# Altium PCB DLP.PcbDoc
Units mil, origin at the board's own origin, x right, y up, seen from the top; angles counter-clockwise.
Board outline 6000 x 4000 mil, 2 copper layers (Top Layer, Bottom Layer); 77 components, 240 nets, 526 pads, 12 vias.
Unrouted connection lines stored in the file: 220.
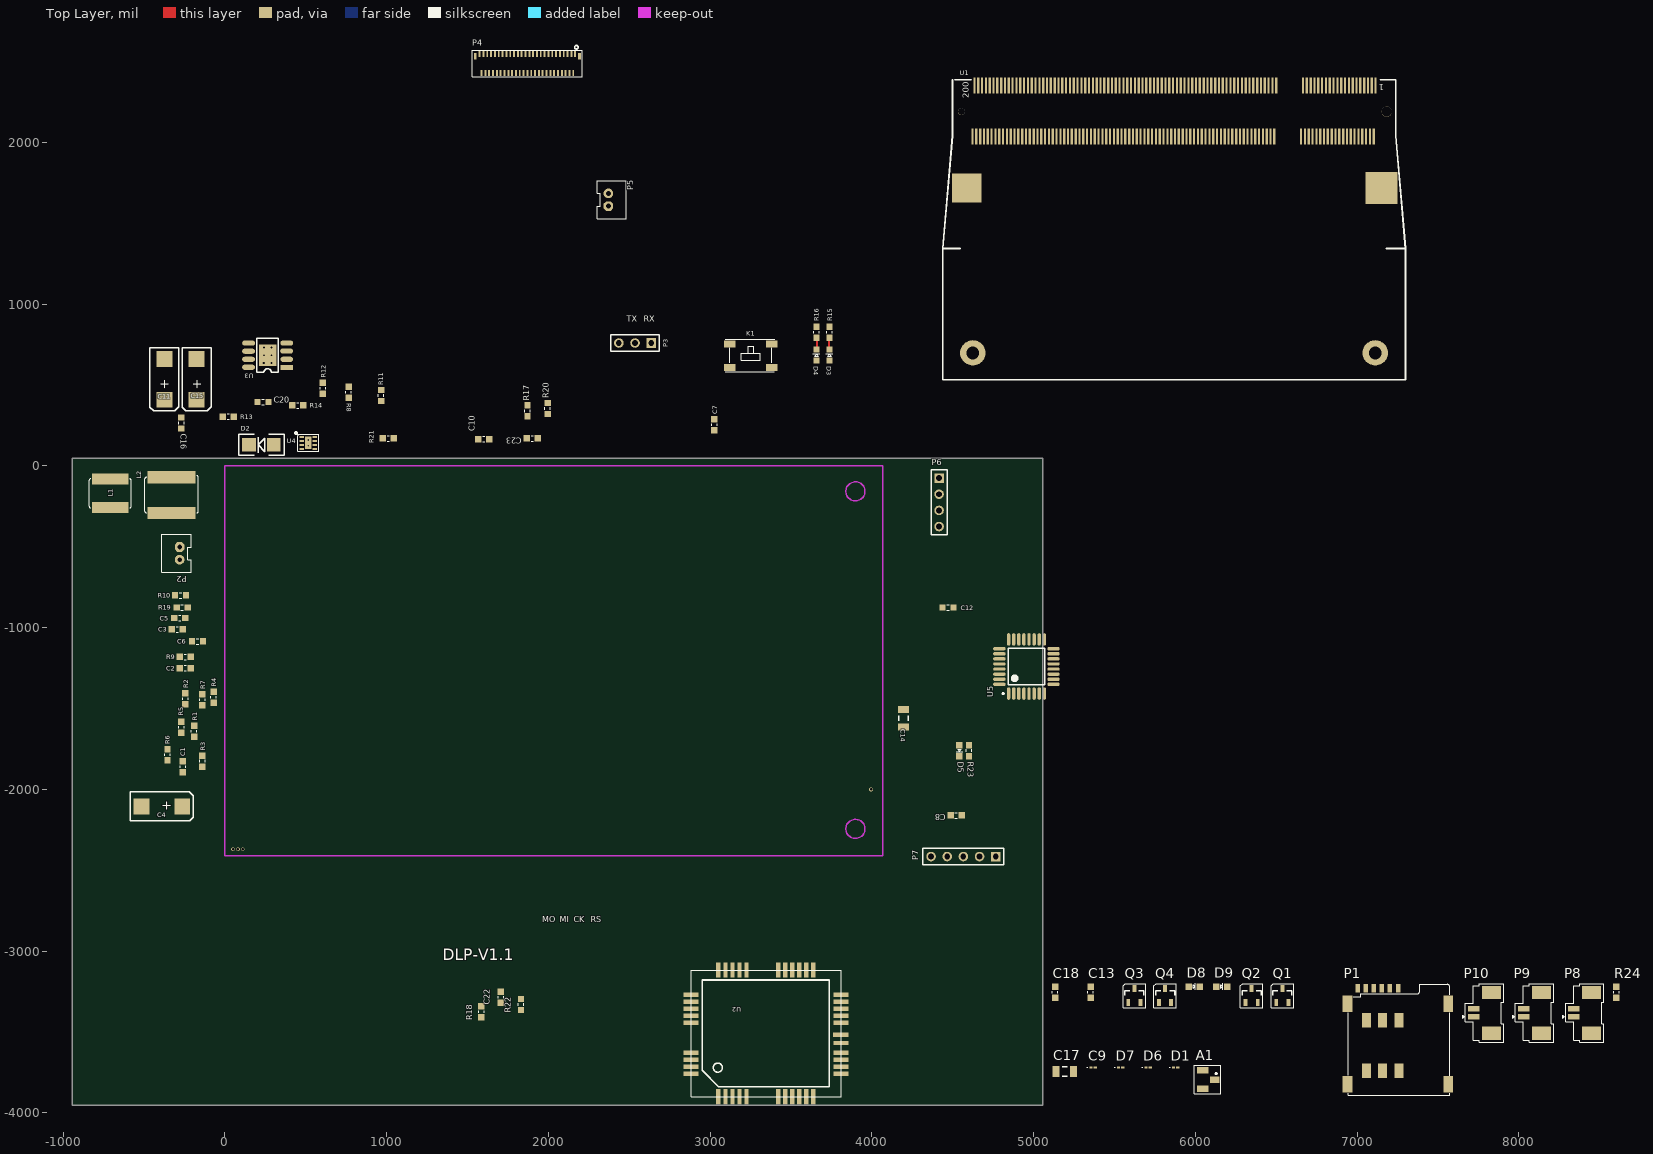
[diagram p0: Top Layer view]
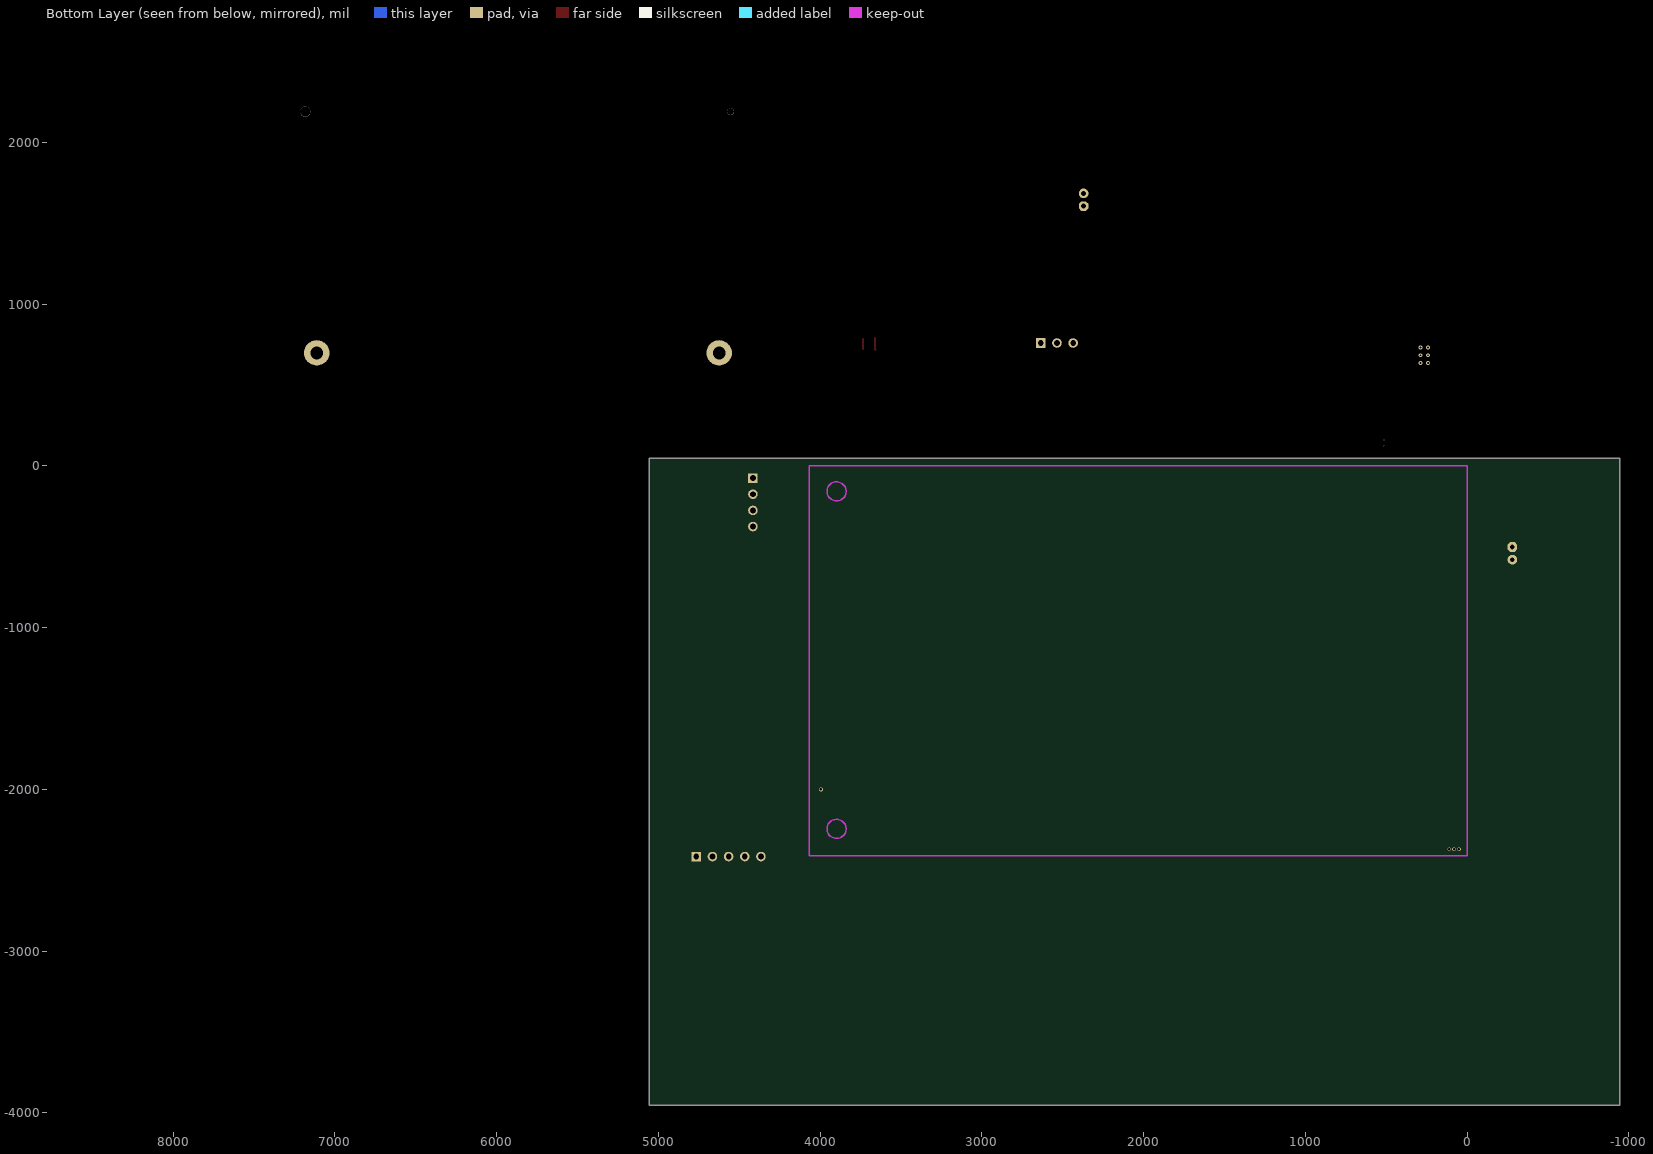
[diagram p1: Bottom Layer view, seen from below]

## Layer stack, top to bottom
Top Solder: solder mask 0.4, Solder Resist, Dk 3.5
Top Layer: signal copper 1.4
Dielectric1: dielectric 12.6, FR-4, Dk 4.8
Bottom Layer: signal copper 1.4
Bottom Solder: solder mask 0.4, Solder Resist, Dk 3.5

## Board outline
-943,-3954 5057,-3954 5057,46 -943,46

## Design rules (kind name [scope] priority, off if disabled: settings)
Clearance [All] p1: gap=6
ComponentClearance [All] p1 off: gap=10 collisioncheckmode=3 verticalgap=10 showdistances=FALSE
FabricationTestPointUsage TestPointUsage [All] p1: valid=0 allowmultiple=FALSE
FabricationTestpoint Testpoint [All] p1: side=3 testpointundercomponent=TRUE minsize=40 maxsize=100 preferedsize=60 minholesize=0 maxholesize=40 preferedholesize=32 testpointgrid=1 allowsidetop=TRUE allowsidebottom=TRUE usegrid=TRUE gridtolerance=0.01
HoleSize [All] p1: absolutevalues=TRUE maxlimit=150 minlimit=1 maxpercent=80.000 minpercent=20.000
PolygonConnect [All] p1: connectstyle=Relief reliefconductorwidth=10 reliefentries=4 polygonreliefangle="90 Angle" airgapwidth=10
RoutingVias [All] p1: holewidth=14 width=28 viastyle="Through Hole" minholewidth=8 minwidth=15 maxholewidth=130 maxwidth=150
SolderMaskExpansion [All] p1: expansion=4
Width [All] p1: maxlimit=100 minlimit=8 preferedwidth=10 minimp=50.000000 maximp=50.000000 favimp=50.000000
26 further rules are at their usual default settings.

## Components (designator, comment, footprint, x,y, rotation, side; value= is the part's Value field where it differs from the comment)
A1 "IPEX" IPEX 6072,-3794 r0 top
C1 "Cap" 0603#1 -260,-1860 r90 top
C2 "Cap" 0603#1 -245,-1250 r180 top
C3 "Cap" 0603#1 -295,-1010 r180 top
C4 "Cap Pol3" C7343 -390,-2105 r180 top
C5 "Cap" 0603#1 -280,-940 r0 top
C6 "Cap" 0603#1 -170,-1085 r0 top
C7 "100PF" 0603#1 3025,255 r270 top
C8 "104" 0603#1 4520,-2160 r180 top
C9 "Cap" 0603#2 5367,-3719 r0 top
C10 "10uF" 0603#1 1600,165 r0 top
C11 "470uF/16V" C7343 -375,535 r90 top
C12 "100nF" 0603#1 4470,-875 r180 top
C13 "0.1uF" 0603#1 5352,-3254 r90 top
C14 "47uF" C1206 4195,-1560 r90 top
C15 "100uF/35V" C7343 -175,535 r90 top
C16 "100nF" 0603#1 -270,265 r270 top
C17 "47uF" C1206 5192,-3744 r0 top
C18 "0.1uF" 0603#1 5132,-3254 r90 top
C20 "10nF" 0603#1 235,395 r0 top
C22 "Cap" 0603#1 1705,-3285 r270 top
C23 "Cap" 0603#1 1900,170 r180 top
D1 "RL0603E012M100K" 0603#2 5877,-3719 r0 top
D2 "SS54" SMA 225,130 r180 top
D3 "BLUE" 0603-LED 3737,686 r90 top
D4 "BLUE" 0603-LED 3657,686 r90 top
D5 "BLUE" 0603-LED 4540,-1760 r270 top
D6 "RL0603E012M100K" 0603#2 5707,-3719 r0 top
D7 "RL0603E012M100K" 0603#2 5537,-3719 r0 top
D8 "WORK" 0603-LED 5992,-3219 r0 top
D9 "LINK" 0603-LED 6162,-3219 r0 top
K1 "AJ" 4*4*1.5 3120,755 r0 top
L1 "2.2uH" L-6045 -710,-80 r270 top
L2 "10uH/4A" L-8040 -330,-70 r270 top
P1 "MircoSIM" "Micro SIM" 7057,-3739 r0 top
P2 "CON2" PH2.0-2P -280,-580 r270 top
P3 "" HDR1X3 2635,760 r180 top
P4 "FPC-51PIN" FH26-51S-0.3SHW 2165,2545 r0 top
P5 "Header 2" PH2.0-2P 2370,1685 r90 top
P6 "CSB" HDR1X4 4415,-75 r270 top
P7 "Header 5" HDR1X5 4765,-2415 r180 top
P8 "UP" 1.25-2P 8337,-3224 r0 top
P9 "DOWN" 1.25-2P 8027,-3224 r0 top
P10 "MOTOR" 1.25-2P 7717,-3224 r0 top
Q1 "NPN" SOT-23-NPN 6537,-3274 r0 top
Q2 "NPN" SOT-23-NPN 6347,-3274 r0 top
Q3 "NPN" SOT-23-NPN 5622,-3274 r0 top
Q4 "NPN" SOT-23-NPN 5812,-3274 r0 top
R1 "Res1" 0603#1 -190,-1640 r90 top
R2 "Res1" 0603#1 -245,-1440 r90 top
R3 "Res1" 0603#1 -140,-1825 r90 top
R4 "Res1" 0603#1 -70,-1430 r90 top
R5 "Res1" 0603#1 -270,-1615 r90 top
R6 "Res1" 0603#1 -355,-1785 r90 top
R7 "Res1" 0603#1 -140,-1445 r90 top
R8 "Res1" 0603#1 765,455 r90 top
R9 "Res1" 0603#1 -245,-1180 r0 top
R10 "Res1" 0603#1 -275,-800 r180 top
R11 "Res1" 0603#1 965,435 r270 top
R12 "Res1" 0603#1 605,480 r270 top
R13 "4.3KF" 0603#1 20,305 r0 top
R14 "1.5KF" 0603#1 450,375 r0 top
R15 "1K" 0603#1 3737,826 r270 top
R16 "1K" 0603#1 3657,826 r270 top
R17 "Res1" 0603#1 1870,340 r90 top
R18 "Res1" 0603#1 1585,-3375 r270 top
R19 "4.3K" 0603#1 -265,-875 r0 top
R20 "Res1" 0603#1 1995,355 r90 top
R21 "680R" 0603#1 1010,170 r180 top
R22 "Res1" 0603#1 1830,-3330 r90 top
R23 "1K" 0603#1 4600,-1760 r270 top
R24 "Res1" 0603#1 8602,-3254 r90 top
U1 "MAX6-200" "SO-DIMM 200" 5870,1460 r180 top
U2 "G3524" G3524 3110,-3485 r90 top
U3 "LM22676" SO-8HP 270,660 r180 top
U4 "TLV62084" WSON8 515,170 r0 top
U5 "ATmega48PA" 32A_M 4955,-1240 r90 top

## Footprints (in the part's own frame and the unit in brackets; to place one, negate y for a bottom-side part, rotate by r counter-clockwise, add the part's x,y. Pads: shape width x height; smd on the part's side, far side on the other; paste and mask are expansions set on the pad)
1.25-2P [mil]
  rect 118x83 smd: 0(112.44,-283.46) 0(112.44,-31.5)
  rect 71x32 smd: 1(2.2,-181.1) 2(2.2,-131.89)
  silkscreen extent -66,-339 187,24
4*4*1.5 [mm]
  rect 1.8x1.1 smd: 1(0,0) 2(6.6,0) 3(0,-3.7) 4(6.6,-3.7)
  silkscreen extent -0.7,-4.4 7.1,0.7
32A_M [mm] "32-Pin Thin Quad Flat Pack 0.8 mm Pitch, IPC Low Density"
  oval 1.95x0.533 smd: 1(-4.25,2.8) 2(-4.25,2) 3(-4.25,1.2) 4(-4.25,0.4) 5(-4.25,-0.4) 6(-4.25,-1.2) 7(-4.25,-2) 8(-4.25,-2.8) 17(4.25,-2.8) 18(4.25,-2) 19(4.25,-1.2) 20(4.25,-0.4) 21(4.25,0.4) 22(4.25,1.2) 23(4.25,2) 24(4.25,2.8)
  oval 0.533x1.95 smd: 9(-2.8,-4.25) 10(-2,-4.25) 11(-1.2,-4.25) 12(-0.4,-4.25) 13(0.4,-4.25) 14(1.2,-4.25) 15(2,-4.25) 16(2.8,-4.25) 25(2.8,4.25) 26(2,4.25) 27(1.2,4.25) 28(0.4,4.25) 29(-0.4,4.25) 30(-1.2,4.25) 31(-2,4.25) 32(-2.8,4.25)
  silkscreen extent -4.37,-2.85 2.85,3.77, body extent -3.5,-3.5 3.5,3.5, height 1.2
0603#1 [mm]
  rect 1x1 smd: 1(-0.864,0) 2(0.864,0)
  silkscreen extent -0.18,-0.43 0.18,0.43
0603#2 [mm] "Chip Inductor, Body 0.6x0.3mm, IPC High Density"
  rect 0.5x0.3 smd: 1(-0.35,0) 2(0.35,0)
  silkscreen extent -0.9,-0.05 -0.9,0.05, body extent -0.33,-0.18 0.33,0.18, height 0.55
0603-LED [mm]
  rect 1x1 smd: 1(-0.864,0) 2(0.864,0)
  silkscreen extent -0.18,-0.51 0.18,0.56
C1206 [mm] "Chip Capacitor, Body 3.2x1.6mm, IPC High Density"
  rect 1.1x1.7 smd: 1(-1.35,0) 2(1.35,0)
  silkscreen extent -0.4,-0.75 0.4,0.75, body extent -1.7,-0.9 1.7,0.9, height 1.3
C7343 [mm] "Molded Capacitor, 2-Leads, Body 7.3x4.3mm, IPC Medium Density"
  rect 2.45x2.5 smd: 1(-3.2,0) 2(3.2,0)
  silkscreen extent -4.95,-2.29 4.95,2.29, body extent -3.75,-2.25 3.75,2.25, height 4.3
FH26-51S-0.3SHW [mm]
  rect 0.45x1 smd: 0(-15.7,-0.3) 0(0.7,-0.3)
  rect 0.3x0.95 smd: 1(0,0.05) 2(-0.3,-2.91) 3(-0.6,0.05) 4(-0.9,-2.91) 5(-1.2,0.05) 6(-1.5,-2.91) 7(-1.8,0.05) 8(-2.1,-2.91) 9(-2.4,0.05) 10(-2.7,-2.91) 11(-3,0.05) 12(-3.3,-2.91) 13(-3.6,0.05) 14(-3.9,-2.91) 15(-4.2,0.05) 16(-4.5,-2.91) 17(-4.8,0.05) 18(-5.1,-2.91) 19(-5.4,0.05) 20(-5.7,-2.91) 21(-6,0.05) 22(-6.3,-2.91) 23(-6.6,0.05) 24(-6.9,-2.91) 25(-7.2,0.05) 26(-7.5,-2.91) 27(-7.8,0.05) 28(-8.1,-2.91) 29(-8.4,0.05) 30(-8.7,-2.91) 31(-9,0.05) 32(-9.3,-2.91) 33(-9.6,0.05) 34(-9.9,-2.91) 35(-10.2,0.05) 36(-10.5,-2.91) 37(-10.8,0.05) 38(-11.1,-2.91) 39(-11.4,0.05) 40(-11.7,-2.91) 41(-12,0.05) 42(-12.3,-2.91) 43(-12.6,0.05) 44(-12.9,-2.91) 45(-13.2,0.05) 46(-13.5,-2.91) 47(-13.8,0.05) 48(-14.1,-2.91) 49(-14.4,0.05) 50(-14.7,-2.91) 51(-15,0.05)
  silkscreen extent -16.2,-3.5 1.1,1.38
G3524 [mm]
  rect 2.4x0.7 smd: 1(-10.55,1.5) 2(-10.55,0.4) 3(-10.55,-0.7) 4(-10.55,-1.8) 5(-10.55,-2.9) 6(-10.55,-7.9) 7(-10.55,-9) 8(-10.55,-10.1) 9(-10.55,-11.2) 10(-10.55,-12.3) 11(-10.55,-13.4) 21(9.35,-13.4) 22(9.35,-12.3) 23(9.35,-11.2) 24(9.35,-10.1) 25(9.35,-9) 26(9.35,-7.9) 27(9.35,-2.9) 28(9.35,-1.8) 29(9.35,-0.7) 30(9.35,0.4) 31(9.35,1.5)
  rect 0.7x2.4 smd: 12(-6.95,-17.75) 13(-5.85,-17.75) 14(-4.75,-17.75) 15(-3.65,-17.75) 16(1.05,-17.75) 17(2.15,-17.75) 18(3.25,-17.75) 19(4.35,-17.75) 20(5.45,-17.75) 32(5.45,5.8) 33(4.35,5.8) 34(3.25,5.8) 35(2.15,5.8) 36(1.05,5.8) 37(-3.65,5.8) 38(-4.75,5.8) 39(-5.85,5.8) 40(-6.95,5.8) 41(-2.1,-17.75) 42(-0.8,-17.7)
  silkscreen extent -10.55,-17.8 9.35,5.8
HDR1X3 [mm] "Connector; Header; 3 Position"
  rect 1.5x1.5 hole 0.9: 1(0,0)
  round 1.5 hole 0.9: 2(2.54,0) 3(5.08,0)
  silkscreen extent -1.27,-1.27 6.35,1.27
HDR1X4 [mm] "Connector; Header; 4 Position"
  rect 1.5x1.5 hole 0.9: 1(0,0)
  round 1.5 hole 0.9: 2(2.54,0) 3(5.08,0) 4(7.62,0)
  silkscreen extent -1.27,-1.27 8.89,1.27
HDR1X5 [mm] "Connector; Header; 5 Position"
  rect 1.5x1.5 hole 0.9: 1(0,0)
  round 1.5 hole 0.9: 2(2.54,0) 3(5.08,0) 4(7.62,0) 5(10.16,0)
  silkscreen extent -1.27,-1.27 11.43,1.27
IPEX [mil] "SOT23, 3-Leads, Body 3.0x2.6mm (max), Pitch 0.95mm, IPC Medium Density"
  rect 59.06x41.34 smd: 1(46.5,-0.5)
  rect 70.87x39.37 smd: 2(-28.5,57.5) 3(-28.5,-57.5)
  silkscreen extent -80,-88 86,88
L-6045 [mm]
  rect 1.7x5.7 smd: 1(0,0) 2(4.5,0)
  silkscreen extent 0,-3.3 4.57,3.3
L-8040 [mm]
  rect 1.9x7.5 smd: 1(0,0) 2(5.6,0)
  silkscreen extent -0.25,-4.19 5.6,4.19
"Micro SIM" [mm]
  rect 1.55x2.6 smd: 0(-2.95,-2.15) 0(-2.95,10.53) 0(12.85,-2.15) 0(12.85,10.53)
  rect 1.4x2.3 smd: 0(0,0) 0(0,7.92) 0(2.54,0) 0(2.54,7.92) 0(5.08,0) 0(5.08,7.92)
  rect 0.7x1.35 smd: 1(-0.12,12.955) 2(2.42,12.955) 3(4.96,12.955) 5(-1.39,12.955) 6(1.15,12.955) 7(3.69,12.955)
  silkscreen extent -2.82,-3.82 13.05,13.58
PH2.0-2P [mil]
  oct 60x60 hole 30: 1(-78.74,0)
  round 60 hole 30: 2(0,0)
  silkscreen extent -157,-110 79,70
SMA [mm] "Molded Diode, 2-Leads, Body 4.3x2.7mm, IPC Medium Density"
  rect 2.15x2.15 smd: 1(-1.93,0) 2(1.93,0)
  silkscreen extent -3.56,-1.65 3.56,1.65, body extent -2.28,-1.42 2.29,1.42, height 2.95
SO-8HP [mm]
  rect 2x0.8 smd: 1(-2.847,1.29)
  oval 2x0.8 smd: 2(-2.847,0.02) 3(-2.813,-1.275) 4(-2.847,-2.52) 5(3.153,-2.52) 6(3.153,-1.25) 7(3.153,0.02) 8(3.153,1.265)
  rect 2.8x3.4 smd: 9(0.128,-0.615)
  silkscreen extent -1.55,-3.31 1.85,2.09
"SO-DIMM 200" [mm]
  round 1.6 hole 1.6: 0(-33.337,-18.553)
  rect 5x5 smd: 0(-32.487,-6.553)
  rect 4.572x4.572 smd: 0(32.613,-6.553)
  round 1.1 hole 1.1: 0(33.463,-18.553)
  rect 0.35x2.55 smd: 1(-31.587,-22.653) 2(-31.287,-14.653) 3(-30.987,-22.653) 4(-30.687,-14.653) 5(-30.387,-22.653) 6(-30.087,-14.653) 7(-29.787,-22.653) 8(-29.487,-14.653) 9(-29.187,-22.653) 10(-28.887,-14.653) 11(-28.587,-22.653) 12(-28.287,-14.653) 13(-27.987,-22.653) 14(-27.687,-14.653) 15(-27.387,-22.653) 16(-27.087,-14.653) 17(-26.787,-22.653) 18(-26.487,-14.653) 19(-26.187,-22.653) 20(-25.887,-14.653) 21(-25.587,-22.653) 22(-25.287,-14.653) 23(-24.987,-22.653) 24(-24.687,-14.653) 25(-24.387,-22.653) 26(-24.087,-14.653) 27(-23.787,-22.653) 28(-23.487,-14.653) 29(-23.187,-22.653) 30(-22.887,-14.653) 31(-22.587,-22.653) 32(-22.287,-14.653) 33(-21.987,-22.653) 34(-21.687,-14.653) 35(-21.387,-22.653) 36(-21.087,-14.653) 37(-20.787,-22.653) 38(-20.487,-14.653) 39(-20.187,-22.653) 40(-19.887,-14.653) 41(-15.987,-22.653) 42(-15.687,-14.653) 43(-15.387,-22.653) 44(-15.087,-14.653) 45(-14.787,-22.653) 46(-14.487,-14.653) 47(-14.187,-22.653) 48(-13.887,-14.653) 49(-13.587,-22.653) 50(-13.287,-14.653) 51(-12.987,-22.653) 52(-12.687,-14.653) 53(-12.387,-22.653) 54(-12.087,-14.653) 55(-11.787,-22.653) 56(-11.487,-14.653) 57(-11.187,-22.653) 58(-10.887,-14.653) 59(-10.587,-22.653) 60(-10.287,-14.653) 61(-9.987,-22.653) 62(-9.687,-14.653) 63(-9.387,-22.653) 64(-9.087,-14.653) 65(-8.787,-22.653) 66(-8.487,-14.653) 67(-8.187,-22.653) 68(-7.887,-14.653) 69(-7.587,-22.653) 70(-7.287,-14.653) 71(-6.987,-22.653) 72(-6.687,-14.653) 73(-6.387,-22.653) 74(-6.087,-14.653) 75(-5.787,-22.653) 76(-5.487,-14.653) 77(-5.187,-22.653) 78(-4.887,-14.653) 79(-4.587,-22.653) 80(-4.287,-14.653) 81(-3.987,-22.653) 82(-3.687,-14.653) 83(-3.387,-22.653) 84(-3.087,-14.653) 85(-2.787,-22.653) 86(-2.487,-14.653) 87(-2.187,-22.653) 88(-1.887,-14.653) 89(-1.587,-22.653) 90(-1.287,-14.653) 91(-0.987,-22.653) 92(-0.687,-14.653) 93(-0.387,-22.653) 94(-0.087,-14.653) 95(0.213,-22.653) 96(0.513,-14.653) 97(0.813,-22.653) 98(1.113,-14.653) 99(1.413,-22.653) 100(1.713,-14.653) 101(2.013,-22.653) 102(2.313,-14.653) 103(2.613,-22.653) 104(2.913,-14.653) 105(3.213,-22.653) 106(3.513,-14.653) 107(3.813,-22.653) 108(4.113,-14.653) 109(4.413,-22.653) 110(4.713,-14.653) 111(5.013,-22.653) 112(5.313,-14.653) 113(5.613,-22.653) 114(5.913,-14.653) 115(6.213,-22.653) 116(6.513,-14.653) 117(6.813,-22.653) 118(7.113,-14.653) 119(7.413,-22.653) 120(7.713,-14.653) 121(8.013,-22.653) 122(8.313,-14.653) 123(8.613,-22.653) 124(8.913,-14.653) 125(9.213,-22.653) 126(9.513,-14.653) 127(9.813,-22.653) 128(10.113,-14.653) 129(10.413,-22.653) 130(10.713,-14.653) 131(11.013,-22.653) 132(11.313,-14.653) 133(11.613,-22.653) 134(11.913,-14.653) 135(12.213,-22.653) 136(12.513,-14.653) 137(12.813,-22.653) 138(13.113,-14.653) 139(13.413,-22.653) 140(13.713,-14.653) 141(14.013,-22.653) 142(14.313,-14.653) 143(14.613,-22.653) 144(14.913,-14.653) 145(15.213,-22.653) 146(15.513,-14.653) 147(15.813,-22.653) 148(16.113,-14.653) 149(16.413,-22.653) 150(16.713,-14.653) 151(17.013,-22.653) 152(17.313,-14.653) 153(17.613,-22.653) 154(17.913,-14.653) 155(18.213,-22.653) 156(18.513,-14.653) 157(18.813,-22.653) 158(19.113,-14.653) 159(19.413,-22.653) 160(19.713,-14.653) 161(20.013,-22.653) 162(20.313,-14.653) 163(20.613,-22.653) 164(20.913,-14.653) 165(21.213,-22.653) 166(21.513,-14.653) 167(21.813,-22.653) 168(22.113,-14.653) 169(22.413,-22.653) 170(22.713,-14.653) 171(23.013,-22.653) 172(23.313,-14.653) 173(23.613,-22.653) 174(23.913,-14.653) 175(24.213,-22.653) 176(24.513,-14.653) 177(24.813,-22.653) 178(25.113,-14.653) 179(25.413,-22.653) 180(25.713,-14.653) 181(26.013,-22.653) 182(26.313,-14.653) 183(26.613,-22.653) 184(26.913,-14.653) 185(27.213,-22.653) 186(27.513,-14.653) 187(27.813,-22.653) 188(28.113,-14.653) 189(28.413,-22.653) 190(28.713,-14.653) 191(29.013,-22.653) 192(29.313,-14.653) 193(29.613,-22.653) 194(29.913,-14.653) 195(30.213,-22.653) 196(30.513,-14.653) 197(30.813,-22.653) 198(31.113,-14.653) 199(31.413,-22.653) 200(31.713,-14.653)
  round 4 hole 2: 201(-31.53,19.336) 202(31.657,19.336)
  silkscreen extent -36.29,-23.55 36.41,23.57
SOT-23-NPN [mm]
  rect 0.6x1.143 smd: 1(0.95,-1.108) 2(-0.95,-1.108) 3(0,1.108)
  silkscreen extent -1.75,-1.89 1.75,1.87, body extent -1.5,-0.66 1.5,0.74, height 1.1
WSON8 [mm] "DRV8837"
  rect 0.7x0.3 smd: 1(-1.05,0.25) 2(-1.05,-0.4) 3(-1.05,-1.05) 4(-1.05,-1.655) 5(1.05,-1.655) 6(1.05,-1.05) 7(1.05,-0.4) 8(1.05,0.25)
  rect 1x2.032 smd: 2(0,-0.679)
  silkscreen extent -2.02,-2.04 1.65,0.95

## Part data
C1 C2 C3 C5 C6 C9 C22 C23: "Capacitor"
C4: "Polarized Capacitor (Surface Mount)"
C7 C12 C16 C20: library part Cap, "Capacitor"
C8: library part CAP
C10 C13 C14 C17 C18: library part 电容, "电容"
C11 C15: library part "Cap Pol1", "Polarized Capacitor (Radial)"
D1 D6 D7: library part "Diode 18TQ045", "Schottky Rectifier"
D2: library part "Diode 1N5408", "3 Amp Medium Power Silicon Rectifier Diode"
D3 D4 D5 D8 D9: library part LED2, "Typical RED, GREEN, YELLOW, AMBER GaAs LED"
K1: library part KEY_1
L1: library part 功率电感
L2: library part Inductor, "Inductor"
P3: library part CON3, "Connector"
P5: "Header, 2-Pin"
P6: library part "Header 4", "Header, 4-Pin"
P7: "Header, 5-Pin"
P8 P9 P10: library part "Header 2", "Header, 2-Pin"
Q1 Q2 Q3 Q4: library part 2N5551, "NPN General Purpose Amplifier"
R1 R2 R3 R4 R5 R6 R7 R8 R9 R10 R11 R12 R17 R18 R20 R22 R24: "Resistor"
R13 R14 R15 R16 R23: library part Res1, "Resistor"
R19 R21: library part 电阻, "电阻"
U5: library part ATmega8-16AC, "8-Bit AVR Microcontroller with 8K Bytes of In-System Programmable Flash Memory"

## Via types
v1: diameter 23.62, hole 11.81, Top Layer to Bottom Layer, 5 vias
v2: diameter 24, hole 15, Top Layer to Bottom Layer, 4 vias
v3: diameter 11, hole 11, Top Layer to Bottom Layer, 2 vias
v4: diameter 23.62, hole 14, Top Layer to Bottom Layer, 1 vias

## Nets (pads, with @x,y where several pads share a name; then routed paths per layer and width w, separated by ;. In a path a pad name is that pad's centre, name@x,y a point inside that pad or via, vN(x,y) a via of type N, cw(c..) or ccw(c..) an arc to the next point about the centre after c; other vN are vias at no path point)
3P3V: U1.12 U1.14 U1.16 U1.18
12V: C15.1 C16.2 U3.7
+3.3V: C4.1 C5.2 C8.2 C14.1 C17.1 C18.1 D4.1 L1.2 P6.4 R10.1 R11.1 R19.2 R22.2 R24.1 U2.33 U2.34 U4.5 U5.4 U5.6 U5.18
+5V: C10.1 C11.1 C12.2 C13.1 D3.1 L2.2 P5.1 R13.2 R20.1 U1.2 U1.4 U1.6 U1.8 U1.10 U4.1 U4.8
+12V: P2.1
AUD3_RXD: U1.114
AUD3_TXC: U1.110
AUD3_TXD: U1.112
AUD3_TXFS: U1.116
CAN1_RX: U1.119
CAN1_TX: U1.117
CAN2_RX: U1.124
CAN2_TX: U1.122
CLK1_N: U1.84
CLK1_P: U1.82
CPUSYNC: P4.1 R17.2
CSB_CS: P6.3 U5.11
CSB_SIG: P6.2 U5.12
CSI0_DAT12: U1.107
CSI0_DAT13: U1.105
CSI0_DAT14: U1.99
CSI0_DAT15: U1.115
CSI0_DAT16: U1.97
CSI0_DAT17: U1.95
CSI0_DAT18: U1.103
CSI0_DAT19: U1.101
CSI0_DATA_EN/VOL-: U1.24
CSI0_HSYNCH: U1.113
CSI0_PIXCLK: U1.111
CSI0_VSYNCH: U1.109
CSI_CLK0M: U1.85
CSI_CLK0P: U1.87
CSI_D0M: U1.81
CSI_D0P: U1.83
CSI_D1M: U1.77
CSI_D1P: U1.79
CSPI1_CLK: U1.47
CSPI1_CS0: U1.41
CSPI1_MISO: U1.43
CSPI1_MOSI: U1.45
CSPI1_RDY: U1.49
CSPI2_CLK: U1.31
CSPI2_CS0: U1.25
CSPI2_CS1: U1.33
CSPI2_MISO: U1.35
CSPI2_MOSI: U1.29
CSPI2_RDY: U1.27
DISP0_CLK: P4.3 U1.179
DISP0_CONTRAST: U1.177
DISP0_DAT0: P4.7 U1.197
DISP0_DAT1: P4.8 U1.171
DISP0_DAT2: P4.9 U1.170
DISP0_DAT3: P4.10 U1.169
DISP0_DAT4: P4.11 U1.174
DISP0_DAT5: P4.12 U1.193
DISP0_DAT6: P4.13 U1.166
DISP0_DAT7: P4.14 U1.195
DISP0_DAT8: P4.16 U1.167
DISP0_DAT9: P4.17 U1.189
DISP0_DAT10: P4.18 U1.172
DISP0_DAT11: P4.19 U1.161
DISP0_DAT12: P4.20 U1.191
DISP0_DAT13: P4.21 U1.165
DISP0_DAT14: P4.22 U1.185
DISP0_DAT15: P4.23 U1.163
DISP0_DAT16: P4.25 U1.157
DISP0_DAT17: P4.26 U1.187
DISP0_DAT18: P4.27 U1.181
DISP0_DAT19: P4.28 U1.162
DISP0_DAT20: P4.29 U1.164
DISP0_DAT21: P4.30 U1.168
DISP0_DAT22: P4.31 U1.183
DISP0_DAT23: P4.32 U1.159
DISP0_DRDY: P4.2 U1.173
DISP0_HSYNCH: P4.5 U1.199
DISP0_VSYNCH: P4.4 U1.175
DMD: P4.41
DOWN: P9.2 U5.1
EIM_BCLK/VOL+: U1.22
EIM_D20: U1.23
ENET_CRS_DV: U1.190
ENET_MDC: U1.198
ENET_MDIO: U1.188
ENET_NINT: U1.180
ENET_NRST: U1.186
ENET_REF_CLK: U1.178
ENET_RX_ER: U1.184
ENET_RXD0: U1.196
ENET_RXD1: U1.182
ENET_TX_EN: U1.192
ENET_TXD0: U1.200
ENET_TXD1: U1.194
FAN_ERR: P4.45
GEN_3V3: D5.1
GND: A1.2 A1.3 C1.1 C2.1 C3.2 C4.2 C5.1 C6.2 C7.1 C8.1 C9.2 C10.2 C11.2 C12.1 C13.2 C14.2 C15.2 C16.1 C17.2 C18.2 C22.2 C23.2 D1.2 D2.1 D6.2 D7.2 K1.1 K1.2 P1.5 P2.2 P3.3 P4.6 P4.15 P4.24 P4.33 P4.44 P4.50 P4.51 P5.2 P6.1 P7.1 Q1.1 Q2.1 Q3.1 Q4.1 R14.2 R15.1 R16.1 R17.1 R21.1 U1.1 U1.3 U1.5 U1.7 U1.9 U1.51 U1.65 U1.93 U1.128 U1.149 U1.176 U1.201 U1.202 U2.1 U2.31 U2.35 U2.36 U2.37 U2.38 U2.40 U3.6 U3.9 U4.2 U4.3 U5.3 U5.5 U5.21
  other v1: 288.57,636.95 240.34,684.2 288.57,684.2 240.34,731.24 288.57,731.44
  other v2: 50,-2370 80,-2370 110,-2370 3995,-2000
  other v4: 240.34,636.95
GPIO_0_CLKO: U1.126
"GPIO_4/SLEEP WAKE": U1.20
GSM_PW: R8.2 U5.24
GSM_RST: R9.2 U5.25
HDMI_CEC_IN: U1.90
HDMI_CLKM: U1.100
HDMI_CLKP: U1.98
HDMI_D0M: U1.104
HDMI_D0P: U1.102
HDMI_D1M: U1.96
HDMI_D1P: U1.94
HDMI_D2M: U1.88
HDMI_D2P: U1.86
HDMI_HPD: U1.92
I2C1_SCL: U1.106
I2C1_SDA: U1.108
I2C2_SCL: U1.158
I2C2_SDA: U1.160
I2C3_SCL: U1.118
I2C3_SDA: U1.120
KEY_COL2/SD3_CD_B: U1.21
LCD_CTL: P4.37 P4.38 R20.2
LINK_LED: Q4.2 R2.2
LVDS0_CLK_N: U1.141
LVDS0_CLK_P: U1.143
LVDS0_TX0_N: U1.133
LVDS0_TX0_P: U1.135
LVDS0_TX1_N: U1.145
LVDS0_TX1_P: U1.147
LVDS0_TX2_N: U1.131
LVDS0_TX2_P: U1.129
LVDS0_TX3_N: U1.137
LVDS0_TX3_P: U1.139
LVDS1_CLK_N: U1.146
LVDS1_CLK_P: U1.148
LVDS1_TX0_N: U1.136
LVDS1_TX0_P: U1.134
LVDS1_TX1_N: U1.130
LVDS1_TX1_P: U1.132
LVDS1_TX2_N: U1.144
LVDS1_TX2_P: U1.142
LVDS1_TX3_N: U1.138
LVDS1_TX3_P: U1.140
MISO: P7.3 U5.16
MOSI: P7.2 U5.15
MX6_ONOFF: U1.37
NANDF_ALE: U1.150
NANDF_CLE: U1.152
NANDF_CS0: U1.11
NANDF_CS1: U1.13
NANDF_CS2: U1.15
NANDF_CS3: U1.155
NANDF_WP_B: U1.154
NetA1_1: A1.1 U2.39
NetC9_1: C9.1 Q2.3 U2.11
NetC20_1: C20.1 D2.2 L2.1 U3.8
NetC20_2: C20.2 U3.1
NetC23_1: C23.1 U5.20
NetD3_2: D3.2 R15.2 | length 60
  Top Layer w12: D3.2@3735,724 R15.2@3735,784
NetD4_2: D4.2 R16.2 | length 63
  Top Layer w10: D4.2 D4.2@3660,720
  Top Layer w12: D4.2@3660,730 R16.2@3660,790
NetD5_2: D5.2 R23.2
NetD8_1: D8.1 R10.2
NetD8_2: D8.2 Q3.3
NetD9_1: D9.1 R11.2
NetD9_2: D9.2 Q4.3
NetL1_1: L1.1 U4.7
NetP4_46: P4.46 R18.1
NetP8_1: P8.1 P9.1 R24.2
NetQ1_2: Q1.2 R8.1
NetQ1_3: Q1.3 U2.10
NetQ2_2: Q2.2 R9.1
NetR2_1: R2.1 U2.13
NetR3_2: R3.2 U2.30
NetR4_2: R4.2 U2.29
NetR5_2: R5.2 U2.28
NetR6_1: R6.1 U2.22
NetR7_1: R7.1 U2.21
NetR12_1: R12.1 U2.20
NetR13_1: R13.1 R14.1 U3.4
NetR19_1: R19.1 R21.2 U4.4
NetR23_1: R23.1 U5.2
NRESET: C7.2 K1.3 K1.4 U1.39
PCIE_RXM: U1.76
PCIE_RXP: U1.74
PCIE_TXM: U1.80
PCIE_TXP: U1.78
RST: C22.1 P7.5 R22.1 U5.29
SATA_RXN: U1.56
SATA_RXP: U1.54
SATA_TXN: U1.58
SATA_TXP: U1.60
SCK: P7.4 U5.17
SCL: P4.43
SD1_CLK: U1.156
SD1_DAT0/CSI0_PWN: U1.17
SD1_DAT1/TOUCH_NEINT1: U1.151
SD1_DAT2/RTC_GPIO: U1.153
SD2_CLK: U1.46
SD2_CMD: U1.50
SD2_DATA0: U1.44
SD2_DATA1: U1.52
SD2_DATA2: U1.42
SD2_DATA3: U1.48
SD3_CLK: U1.59
SD3_CMD: U1.57
SD3_DATA0: U1.63
SD3_DATA1: U1.61
SD3_DATA2: U1.55
SD3_DATA3: U1.53
SD3_RST/SD3_WP: U1.19
SDA: P4.42
SIM_CLK: C2.2 D1.1 P1.3 R3.1
SIM_DAT: C3.1 D6.1 P1.7 R4.1
SIM_RST: C6.1 D7.1 P1.2 R5.1
STANDBY: R18.2 U5.23
STAT: R1.1 U2.12
UART1_RX: P3.1 U1.89
UART1_TX: P3.2 U1.91
UART2_CTS: U1.26
UART2_RTS: U1.28
UART2_RXD: U1.32 U5.31
UART2_TXD: U1.30 U5.30
UART3_CTS: U1.34
UART3_RTS: U1.36
UART3_RXD: R7.2 U1.40
UART3_TXD: R6.2 U1.38
UART4_RXD: U1.123
UART4_TXD: U1.121
UART5_RXD: U1.125
UART5_TXD: U1.127
UP: P8.2 U5.32
USB_H1_OC: U1.73
USB_H1_PWR_EN: U1.67
USB_H1_VBUS: U1.75
USB_HOST_DN: U1.69
USB_HOST_DP: U1.71
USB_OTG_DN: U1.66
USB_OTG_DP: U1.68
USB_OTG_ID: U1.72
USB_OTG_OC: U1.62
USB_OTG_PWR_EN: U1.64
USB_OTG_VBUS: U1.70
VDD3.0: R12.2 U2.19
VSIM: C1.2 P1.1 U2.27
WORK_LED: Q3.2 R1.2
pads on no net: P1.0 P1.6 P4.0 P4.34 P4.35 P4.36 P4.39 P4.40 P4.47 P4.48 P4.49 P8.0 P9.0 P10.0 P10.1 P10.2 U1.0 U2.2 U2.3 U2.4 U2.5 U2.6 U2.7 U2.8 U2.9 U2.14 U2.15 U2.16 U2.17 U2.18 U2.23 U2.24 U2.25 U2.26 U2.32 U2.41 U2.42 U3.2 U3.3 U3.5 U4.6 U5.7 U5.8 U5.9 U5.10 U5.13 U5.14 U5.19 U5.22 U5.26 U5.27 U5.28
copper on no net:
  other v3: 515,125 515,160

## Keep-outs
Keep-Out Layer:
  circle w7.87: c3897.64,-2244.09 r59.06
  circle w7.87: c3897.64,-157.48 r59.06
  lines w8: 0,-2411 4065,-2411 4065,0 0,0 0,-2411

## Silkscreen, mask and mechanical layers (free items; w line width, h text height)
Top Overlay:
  text "TX" at 2485,880 h60
  text "RX" at 2590,880 h60
  text "MO" at 1960,-2835 h60
  text "MI" at 2070,-2835 h60
  text "CK" at 2155,-2835 h60
  text "RS" at 2260,-2835 h60
  text "DLP-V1.1" at 1345,-3080 h120

## Text inside footprints (layer, text, board x,y; h text height)
C4: Top Overlay "+" at -325,-2077 h59.06 r180
C11: Top Overlay "+" at -347,470 h59.06 r90
C15: Top Overlay "+" at -147,470 h59.06 r90
U1: Top Overlay "200" at 4597,2272 h39.37 r90; Top Overlay "1" at 7167,2360 h39.37 r180